# Altium PCB jz_dlt0.5.PcbDoc
Units mm, origin at the board's own origin, x right, y up, seen from the top; angles counter-clockwise.
Board outline 61.85 x 115.19 mm, 2 copper layers (Top Layer, Bottom Layer); 92 components, 65 nets, 356 pads, 57 vias.
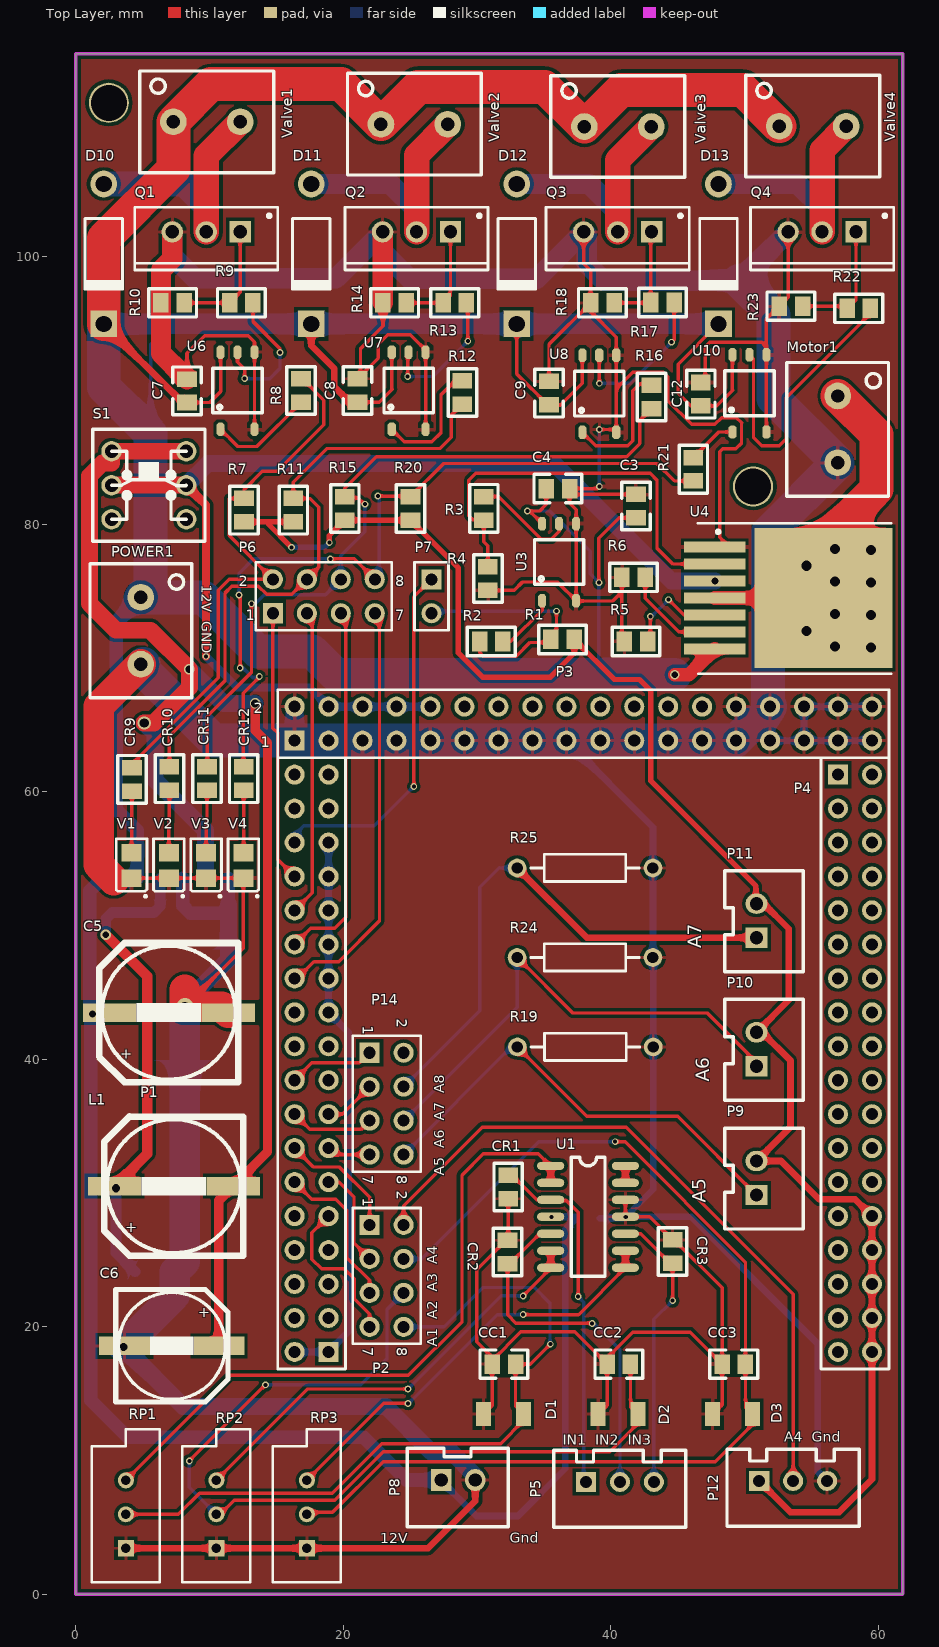
[diagram p0: Top Layer view]
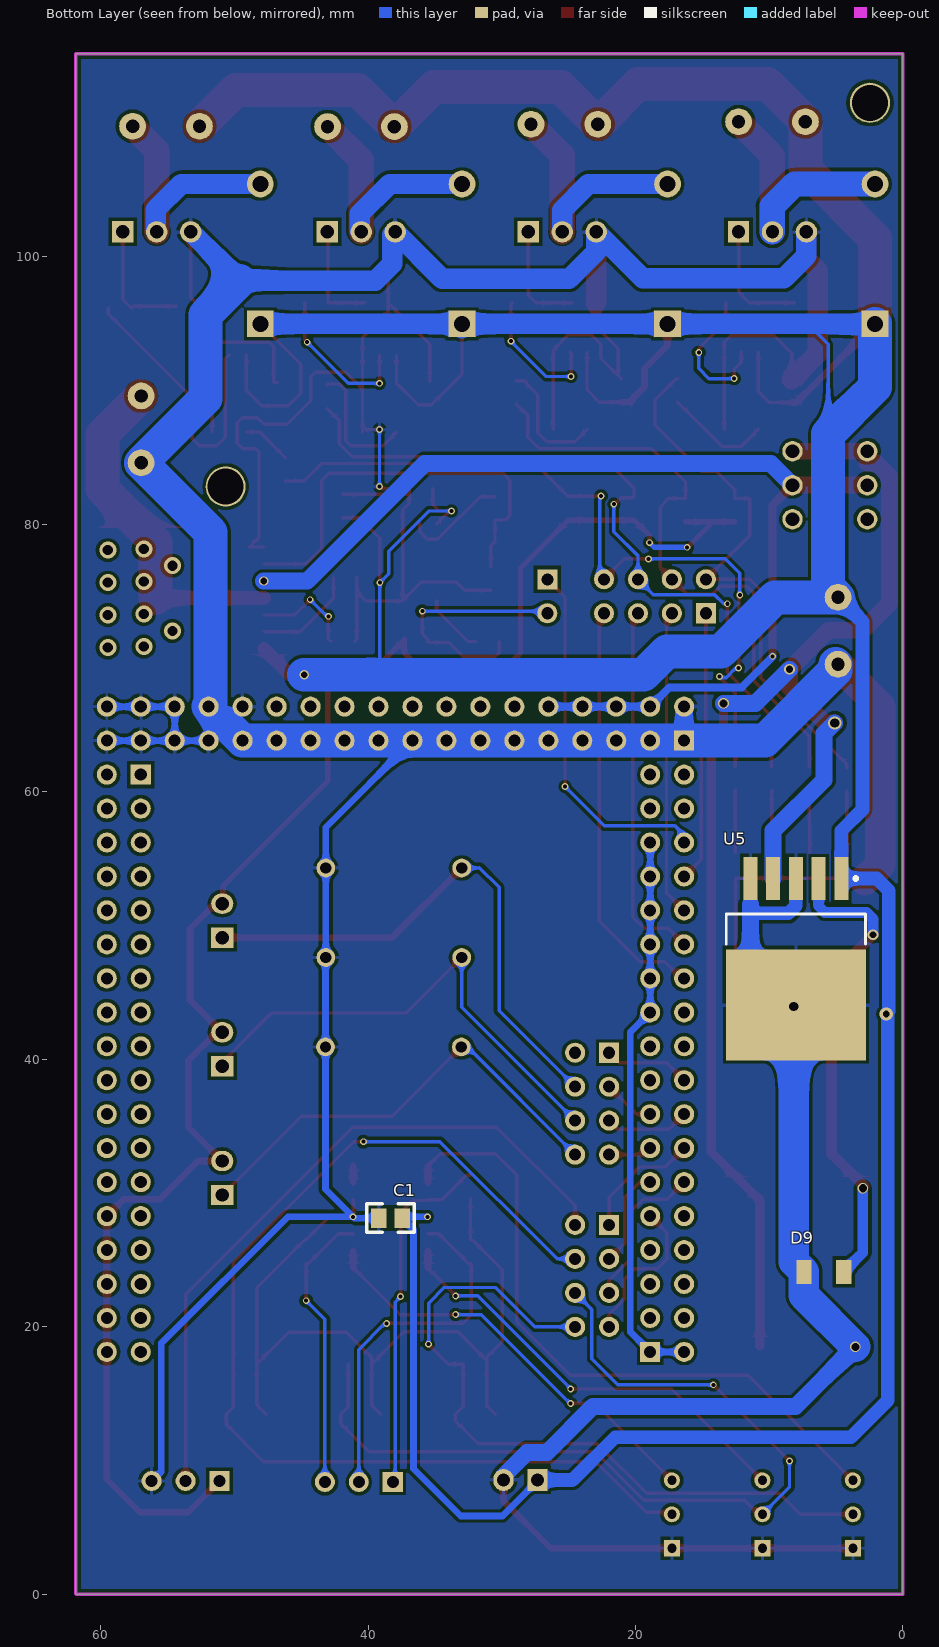
[diagram p1: Bottom Layer view, seen from below]
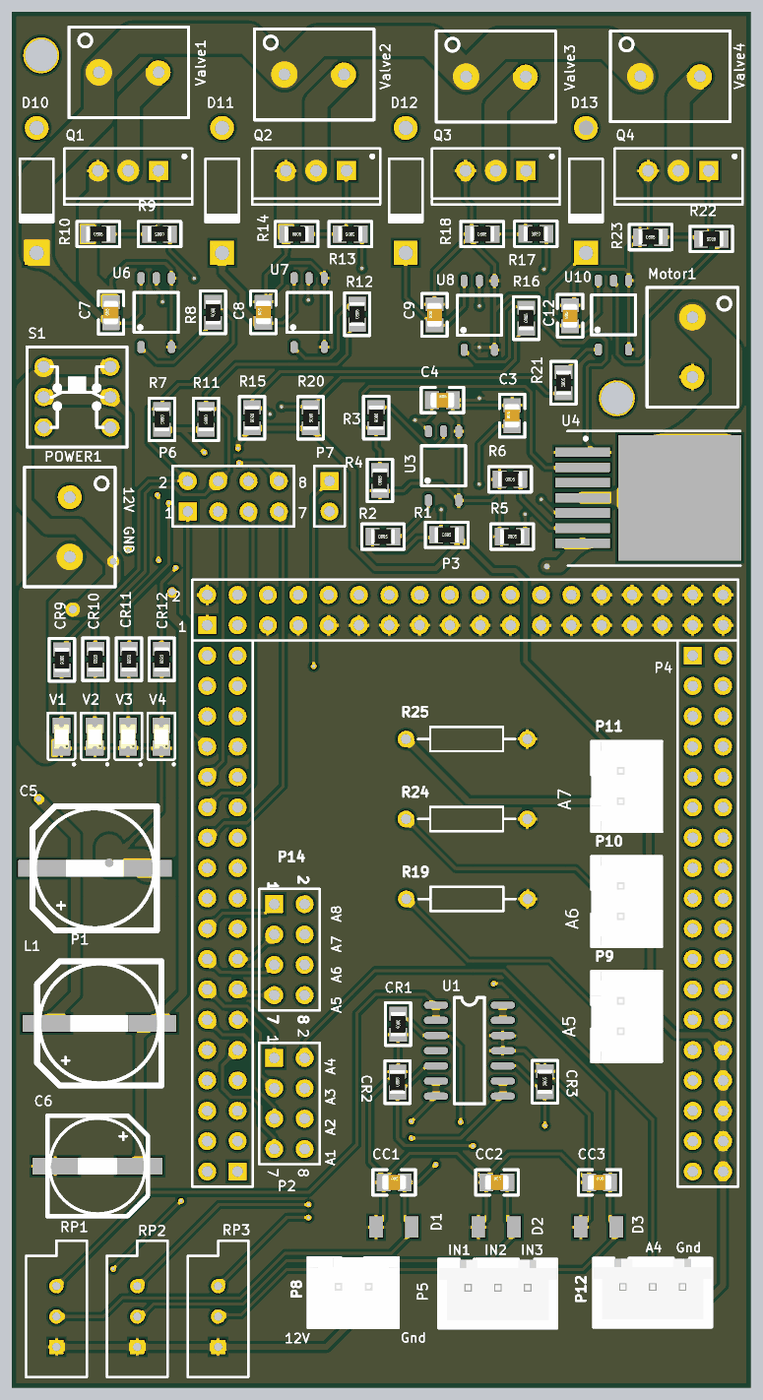
[diagram p2: 3D render of the assembled board from above, using the file's embedded part models]

## Layer stack, top to bottom
Top Solder: solder mask 0.0102, Solder Resist, Dk 3.5
Top Layer: signal copper 0.0356
Dielectric 1: dielectric 0.32, FR-4, Dk 4.8
Bottom Layer: signal copper 0.0356
Bottom Solder: solder mask 0.0102, Solder Resist, Dk 3.5

## Board outline
0,0 61.849,0 61.849,115.189 0,115.189

## Design rules (kind name [scope] priority, off if disabled: settings)
Clearance [All] p1: gap=0.254 ignorepadtopadclearanceinfootprint=FALSE except(0: Arc-Hole Track-Hole SMDPad-Hole THPad-Hole Via-Hole Fill-Hole Poly-Hole Region-Hole Text-Hole)
MinimumSolderMaskSliver [All] p1: minsoldermaskwidth=0.178
PolygonConnect [All] p1: connectstyle=Relief reliefconductorwidth=0.254 reliefentries=4 polygonreliefangle="90 Angle" airgapwidth=0.254
RoutingVias [All] p1: holewidth=0.3 width=0.5 viastyle="Through Hole" minholewidth=0.3 minwidth=0.5 maxholewidth=0.711 maxwidth=1.27
SilkToSilkClearance [All] p1: silktosilkclearance=0
SilkToSolderMaskClearance [IsPad] p1: minsilkscreentomaskgap=0 clearancetoexposedcopper=TRUE
SolderMaskExpansion [All] p1: expansion=0.102
Width [All] p1: maxlimit=2.54 minlimit=0.254 preferedwidth=0.254 minimp=50.000000 maximp=50.000000 favimp=50.000000
Width GND [InNet('GND')] p2: maxlimit=2.54 minlimit=0.254 preferedwidth=1.27 minimp=50.000000 maximp=50.000000 favimp=50.000000
Width 3.3V [InNet('VDD3.3')] p3: maxlimit=2.54 minlimit=0.254 preferedwidth=1.27 minimp=50.000000 maximp=50.000000 favimp=50.000000
Width 5V [InNet('DV5')] p4: maxlimit=2.54 minlimit=0.254 preferedwidth=1.27 minimp=50.000000 maximp=50.000000 favimp=50.000000
Width POWER [InNet('POWERA')] p5: maxlimit=2.54 minlimit=0.254 preferedwidth=2.54 minimp=50.000000 maximp=50.000000 favimp=50.000000
27 further rules are at their usual default settings.

## Components (designator, comment, footprint, x,y, rotation, side; value= is the part's Value field where it differs from the comment)
C1 "104" LC-0805_C 38.329,28.118 r0 bottom
C3 "0.1uF" LC-0805_C 41.885,81.37 r90 top locked
C4 "0.1uF" LC-0805_C 36.043,82.677 r0 top locked
C5 "10uF,16V" SMD-EC-F10 2.52,43.485 r0 top value=680uF
C6 "10uF,16V" SMD-EC-F8 10.693,18.567 r180 top value=220uF
C7 "0.1uF" LC-0805_C 8.306,89.992 r90 top locked
C8 "0.1uF" LC-0805_C 21.057,90.018 r90 top locked
C9 "0.1uF" LC-0805_C 35.382,89.814 r90 top locked
C12 "0.1uF" LC-0805_C 46.736,89.738 r90 top locked
CC1 "105" LC-0805_C 32.004,17.196 r0 top
CC2 "105" LC-0805_C 40.602,17.196 r0 top
CC3 "105" LC-0805_C 49.2,17.196 r0 top
CR1 "150" LC-0805_R 32.334,30.443 r270 top
CR2 "150" LC-0805_R 32.283,25.592 r90 top
CR3 "150" LC-0805_R 44.628,25.617 r90 top
CR9 "1K" LC-0805_R 4.191,60.935 r270 top locked
CR10 "1K" LC-0805_R 6.993,60.985 r270 top locked
CR11 "1K" LC-0805_R 9.804,60.985 r270 top locked
CR12 "1K" LC-0805_R 12.548,60.985 r270 top
D1 "Diode  Zener" LC-1206 31.979,13.462 r0 top
D2 "Diode  Zener" LC-1206 40.543,13.462 r0 top
D3 "Diode  Zener" LC-1206 49.107,13.462 r0 top
D9 "IN5824" LC-1206 5.91,24.105 r180 bottom
D10 "Diode 1N4001" DO-41 2.083,100.228 r270 top locked
D11 "Diode 1N4001" DO-41 17.602,100.228 r270 top locked
D12 "Diode 1N4001" DO-41 32.969,100.228 r270 top locked
D13 "Diode 1N4001" DO-41 48.057,100.228 r270 top locked
L1 "Inductor" SMD-EC-F10 2.896,30.505 r0 top value=33uH
Motor1 "端子2P" DUANZI2P 56.972,89.607 r270 top locked
P1 "Header 18X2" HDR2X18 18.898,18.11 r90 top locked
P2 "Header 4X2" HDR2X4 21.971,27.61 r270 top
P3 "Header 18X2" HDR2X18 16.358,63.83 r0 top
P4 "Header 18X2" HDR2X18 56.998,61.29 r270 top
P5 "Header 3" XH2.54-3 38.151,8.382 r0 top
P6 "Header 4X2" HDR2X4 14.732,73.355 r0 top locked
P7 "Header 2" HDR1X2 26.594,75.895 r270 top locked
P8 "Header 2" XH2.54-2 29.87,8.534 r0 top
P9 "Header 2" XH2.54-2 50.902,32.388 r90 top
P10 "Header 2" XH2.54-2 50.902,42.013 r90 top
P11 "Header 2" XH2.54-2 50.902,51.638 r90 top
P12 "Header 3" XH2.54-3 51.105,8.458 r0 top
P14 "Header 4X2" HDR2X4 21.971,40.488 r270 top
POWER1 "端子2P" DUANZI2P 4.851,74.549 r270 top locked
Q1 "IRF540N" TO-220AB 9.754,101.879 r180 top locked
Q2 "IRF540N" TO-220AB 25.476,101.879 r180 top locked
Q3 "IRF540N" TO-220AB 40.513,101.879 r180 top locked
Q4 "IRF540N" TO-220AB 55.804,101.879 r180 top locked
R1 "10k" LC-0805_R 36.398,71.399 r0 top locked
R2 "150" LC-0805_R 31.064,71.247 r0 top locked
R3 "50" LC-0805_R 30.505,81.204 r270 top locked
R4 "10k" LC-0805_R 30.81,75.946 r90 top locked
R5 "3.3K" LC-0805_R 41.885,71.247 r0 top locked
R6 "3.3K" LC-0805_R 41.707,76.048 r0 top locked
R7 "10k" LC-0805_R 12.573,81.065 r270 top locked
R8 "150" LC-0805_R 16.84,90.018 r270 top locked
R9 "50" LC-0805_R 12.37,96.571 r180 top locked
R10 "10K" LC-0805_R 7.239,96.571 r0 top locked
R11 "10k" LC-0805_R 16.256,81.065 r270 top locked
R12 "150" LC-0805_R 28.905,89.865 r90 top locked
R13 "50" LC-0805_R 28.332,96.571 r180 top locked
R14 "10K" LC-0805_R 23.839,96.571 r0 top locked
R15 "10k" LC-0805_R 20.108,81.192 r270 top locked
R16 "150" LC-0805_R 43.053,89.535 r90 top locked
R17 "50" LC-0805_R 43.866,96.596 r180 top locked
R18 "10K" LC-0805_R 39.37,96.571 r0 top locked
R19 "3.3K" AXIAL-0.4 38.1,40.919 r0 top value=30K
R20 "10k" LC-0805_R 25.019,81.192 r270 top locked
R21 "150" LC-0805_R 46.177,84.125 r90 top locked
R22 "50" LC-0805_R 58.547,96.164 r180 top locked
R23 "10K" LC-0805_R 53.467,96.319 r0 top locked
R24 "3.3K" AXIAL-0.4 38.075,47.612 r0 top value=30K
R25 "3.3K" AXIAL-0.4 38.075,54.305 r0 top value=30K
RP1 "10K" VR5 3.734,5.969 r90 top
RP2 "10K" VR5 10.503,5.969 r90 top
RP3 "10K" VR5 17.272,5.969 r90 top
S1 "SW DPDT" AN88 5.461,82.931 r0 top locked
U1 "LM324AD" SO-14 31.902,33.96 r0 top
U3 "TLP155" so6 34.874,74.286 r0 top locked
U4 "BTS7960" BTS7960 56.032,74.498 r270 top locked
U5 "LM2596S-5.0" TS5B_N 8.001,47.519 r270 bottom locked
U6 "TLP155" so6 10.82,87.113 r0 top locked
U7 "TLP155" so6 23.622,87.113 r0 top locked
U8 "TLP155" so6 37.871,86.884 r0 top locked
U10 "TLP155" so6 49.098,86.91 r0 top locked
V1 "LED Chip" CLED2012-0805 4.166,54.498 r270 top locked
V2 "LED Chip" CLED2012-0805 6.951,54.498 r270 top locked
V3 "LED Chip" CLED2012-0805 9.737,54.498 r270 top locked
V4 "LED Chip" CLED2012-0805 12.522,54.498 r270 top locked
Valve1 "端子2P" DUANZI2P 7.29,110.109 r0 top locked
Valve2 "端子2P" DUANZI2P 22.813,109.931 r0 top locked
Valve3 "端子2P" DUANZI2P 38.028,109.753 r0 top locked
Valve4 "端子2P" DUANZI2P 52.607,109.779 r0 top locked

## Footprints (in the part's own frame and the unit in brackets; to place one, negate y for a bottom-side part, rotate by r counter-clockwise, add the part's x,y. Pads: shape width x height; smd on the part's side, far side on the other; paste and mask are expansions set on the pad)
AN88 [mil]
  round 60 hole 40: 1(-110,100) 2(-110,0) 3(-110,-100) 4(110,-100) 5(110,0) 6(110,100)
  silkscreen extent -165,-165 165,165
AXIAL-0.4 [mm] "Axial Device, Thru-Hole; 2 Leads; 0.4 in Pin Spacing"
  round 1.4 hole 0.85: 1(-5.08,0) 2(5.08,0)
  silkscreen extent -4.06,-1.02 4.06,1.02
BTS7960 [mm] "贴片BTS7960"
  rect 0.8x4.6 smd: 1(-3.81,-8.255) 2(-2.54,-8.255) 3(-1.27,-8.255) 4(0,-8.255) 5(1.27,-8.255) 6(2.54,-8.255) 7(3.81,-8.255)
  rect 10.5x10.3 smd: 8(0,-0.127)
  silkscreen extent -5.59,-9.53 5.68,4.96
CLED2012-0805 [mm]
  rect 1.3x1.5 smd: 1(-0.95,0) 2(0.95,0)
  silkscreen extent -2,-1.15 2.36,1.15, body extent -1,-0.63 1,0.62, height 0.7
DO-41 [mm] "Diode, Axial; Body 5.2 x 2.7 mm (LxDia. max), Lead Dia. 0.86 mm (max)"
  round 2 hole 1.2: 1(-5.23,0)
  rect 2x2 hole 1.2: 2(5.23,0)
  silkscreen extent -2.65,-1.4 2.75,1.4
DUANZI2P [mm]
  round 2 hole 1: 0(0,0) 1(5,0)
  silkscreen extent -2.5,-3.8 7.5,3.8
HDR1X2 [mm] "Connector; Header; 2 Position"
  rect 1.5x1.5 hole 0.9: 1(0,0)
  round 1.5 hole 0.9: 2(2.54,0)
  silkscreen extent -1.27,-1.27 3.81,1.27
HDR2X4 [mm] "Connector; Header; 4x2 Position"
  rect 1.5x1.5 hole 0.9: 1(0,0)
  round 1.5 hole 0.9: 2(0,2.54) 3(2.54,0) 4(2.54,2.54) 5(5.08,0) 6(5.08,2.54) 7(7.62,0) 8(7.62,2.54)
  silkscreen extent -1.27,-1.27 8.89,3.81
HDR2X18 [mm] "Connector; Header; 18x2 Position"
  rect 1.5x1.5 hole 0.9: 1(0,0)
  round 1.5 hole 0.9: 2(0,2.54) 3(2.54,0) 4(2.54,2.54) 5(5.08,0) 6(5.08,2.54) 7(7.62,0) 8(7.62,2.54) 9(10.16,0) 10(10.16,2.54) 11(12.7,0) 12(12.7,2.54) 13(15.24,0) 14(15.24,2.54) 15(17.78,0) 16(17.78,2.54) 17(20.32,0) 18(20.32,2.54) 19(22.86,0) 20(22.86,2.54) 21(25.4,0) 22(25.4,2.54) 23(27.94,0) 24(27.94,2.54) 25(30.48,0) 26(30.48,2.54) 27(33.02,0) 28(33.02,2.54) 29(35.56,0) 30(35.56,2.54) 31(38.1,0) 32(38.1,2.54) 33(40.64,0) 34(40.64,2.54) 35(43.18,0) 36(43.18,2.54)
  silkscreen extent -1.27,-1.27 44.45,3.81
LC-0805_C [mm]
  rect 1.16x1.47 smd: 1(-0.875,0) 2(0.875,0)
  silkscreen extent -1.78,-1.06 1.78,1.06, body extent -1,-0.63 1,0.63, height 0.77
LC-0805_R [mm]
  rect 1.16x1.47 smd: 1(-0.875,0) 2(0.875,0)
  silkscreen extent -1.78,-1.06 1.78,1.06, body extent -1,-0.62 1,0.63, height 0.49
LC-1206 [mm]
  rect 1.13x1.8 smd: 1(-1.49,0) 2(1.49,0)
SMD-EC-F8 [mm]
  rect 3.8x1.4 smd: 1(0,0) 2(7.051,0)
  silkscreen extent -0.69,-4.22 7.71,4.2
SMD-EC-F10 [mm]
  rect 4x1.4 smd: 1(0,0) 2(8.86,0)
  silkscreen extent -0.78,-5.2 9.62,5.2
so6 [mm]
  oct 0.6x1 smd: 1(0,0) 3(2.54,0) 4(2.54,5.775) 5(1.27,5.775) 6(0,5.775)
  silkscreen extent -0.58,1.22 3.12,4.57
SO-14 [mil]
  oval 80x24 smd: 1(142,-76) 2(142,-126) 3(142,-176) 4(142,-226) 5(142,-276) 6(142,-326) 7(142,-376) 8(362,-376) 9(362,-326) 10(362,-276) 11(362,-226) 12(362,-176) 13(362,-126) 14(362,-76)
  silkscreen extent 202,-401 302,-51
TO-220AB [mm] "TO, Thru-Hole, Vertical, Heatsink Mounted; 3 In-Line Leads; Pitch 2.54 mm"
  rect 1.6x1.6 hole 1: 1(-2.54,0)
  round 1.6 hole 1: 2(0,0) 3(2.54,0)
  silkscreen extent -5.35,-1.85 5.35,2.85, body extent -5.4,-1.9 5.4,2.9, height 19.3
TS5B_N [mm] "D2-PAK, 6-Leads, Body 8.6x10.2mm, Pitch 1.7mm, Lead Span 14.1mm, IPC Medium Density"
  rect 3.2x1.05 smd: 1(-6,3.4) 2(-6,1.7) 3(-6,0) 4(-6,-1.7) 5(-6,-3.4)
  rect 8.3x10.45 smd: 6(3.45,0)
  silkscreen extent -6.12,-5.2 -1.1,5.2, body extent -3.35,-5.2 6.05,5.2, height 4.65
VR5 [mm] "Thru-Hole; 3 Leads"
  rect 1.2x1.2 hole 0.7: 1(-2.54,0)
  round 1.2 hole 0.7: 2(0,0) 3(2.54,0)
  silkscreen extent -5.08,-2.54 6.35,2.54
XH2.54-2 [mil]
  rect 60x65 hole 39.37: 1(-100.1,0)
  oval 60x65 hole 39.37: 2(0,0)
  silkscreen extent -200,-138 97,93, body extent -198,-142 98,94, height 276
XH2.54-3 [mm]
  rect 1.5x1.5 hole 0.9: 1(0,0)
  round 1.5 hole 0.9: 2(2.54,0) 3(5.08,0)
  silkscreen extent -2.41,-3.38 7.47,2.39, body extent -2.41,-3.41 7.49,2.34, height 7

## Part data
C1: library part CAP(瓷片,104), "1.02.08.0014"
C3 C4 C7 C8 C9 C12: library part Cap, "Capacitor", LatestRevisionDate=17-Jul-2002, LatestRevisionNote="Re-released for DXP Platform.", PackageDescription="Radial Cap, Thru-Hole; 2 Leads; 0.3 in Pin Spacing", PackageReference=RAD-0.3, Published=8-Jun-2000, Publisher="Altium Limited"
C5 C6: library part "Cap Pol 2x5", "Polarized Capacitor (Radial)", Voltage=16V, Published=8-Jun-2000, Publisher="Altium Limited", Revision="July-2002: Re-released for DXP Platform."
CC1 CC2 CC3: library part "Cap Chip 0805", "Polarized Capacitor (Radial)", Published=8-Jun-2000, Publisher="Altium Limited", Revision="July-2002: Re-released for DXP Platform."
CR1 CR2 CR3 CR9 CR10 CR11 CR12: library part "Resistor Chip 0805", "Resistor", Published=8-Jun-2000, Publisher="Altium Limited", Revision="July-2002: Re-released for DXP Platform."
D1 D2 D3: "Zener Diode", Published=8-Jun-2000, Publisher="Altium Limited", Revision="July-2002: Re-released for DXP Platform."
D9: library part "Diode  Zener", "Zener Diode", Published=8-Jun-2000, Publisher="Altium Limited", Revision="July-2002: Re-released for DXP Platform."
D10 D11 D12 D13: "1 Amp General Purpose Rectifier", Code_JEDEC=DO-204-AL, ComponentLink1Description="Manufacturer Link", ComponentLink1URL=http://www.fairchildsemi.com/, ComponentLink2Description=Datasheet, ComponentLink2URL=http://www.fairchildsemi.com/ds/1N%2F1N4001.pdf, DatasheetVersion=1998, LatestRevisionDate=17-Jul-2002, LatestRevisionNote="Re-released for DXP Platform.", PackageDescription="Diode, Axial; Body 5.2 x 2.7 mm (LxDia. max), Lead Dia. 0.86 mm (max)", PackageReference=DO-41, PackageVersion=Aug-1999, Published=8-Jun-2000, Publisher="Altium Limited"
Motor1 POWER1 Valve1 Valve2 Valve3 Valve4: library part DUANZI2
P1 P3 P4: "Header, 18-Pin, Dual row", LatestRevisionDate=17-Jul-2002, LatestRevisionNote="Re-released for DXP Platform.", Publisher="Altium Limited"
P2 P6 P14: "Header, 4-Pin, Dual row", LatestRevisionDate=17-Jul-2002, LatestRevisionNote="Re-released for DXP Platform.", Publisher="Altium Limited"
P5 P12: "Header, 3-Pin", LatestRevisionDate=17-Jul-2002, LatestRevisionNote="Re-released for DXP Platform.", Publisher="Altium Limited"
P7 P8 P9 P10 P11: "Header, 2-Pin", LatestRevisionDate=17-Jul-2002, LatestRevisionNote="Re-released for DXP Platform.", Publisher="Altium Limited"
Q1 Q2 Q3 Q4: "HEXFET Power MOSFET", ComponentLink1Description="Manufacturer Link", ComponentLink1URL=http://www.irf.com/, ComponentLink2Description=Datasheet, ComponentLink2URL=http://www.irf.com/product-info/datasheets/data/irf540n.pdf, DatasheetVersion=May-1998, LatestRevisionDate=17-Jul-2002, LatestRevisionNote="Re-released for DXP Platform.", Note="Pin 2 is electrically connected to pin 4.", PackageDescription="TO, Thru-Hole, Vertical, Heatsink Mounted; 3 In-Line Leads; Pitch 2.54 mm", PackageReference=TO-220AB, PackageVersion=Feb-1997, Published=8-Jun-2000, Publisher="Altium Limited", Sim Note="Thermal Model provided is not called on from main Subckt."
R1 R2 R3 R4 R5 R6 R7 R8 R9 R10 R11 R12 R13 R14 R15 R16 R17 R18 R19 R20 R21 R22 R23 R24 R25: library part Res2, "Resistor", LatestRevisionDate=17-Jul-2002, LatestRevisionNote="Re-released for DXP Platform.", PackageDescription="Axial Device, Thru-Hole; 2 Leads; 0.4 in Pin Spacing", PackageReference=AXIAL-0.4, Published=8-Jun-2000, Publisher="Altium Limited"
RP1 RP2 RP3: library part Res_t
S1: "Switch", Code_IPC=SOT26A-6, Code_JEITA=SC-74, LatestRevisionDate=29-May-2009, LatestRevisionNote="IPC-7351 Footprint Added.", PackageDescription="6-Pin SOT-23 Package 0.95 mm Pitch, 2.7 mm Lead Span", PackageReference=SOT23-6, PackageVersion=Mar-2001, Published=24-Mar-1999, Publisher="Altium Limited"
U1: "Quadruple Operational Amplifier", PackageDocument=Jan-1998, ComponentLink1Description="Manufacturer Link", ComponentLink1URL=http://www.ti.com/, DatasheetDocument=Jan-1989, LatestRevisionDate=4-Mar-2005, LatestRevisionNote="Stylized 3D Model Added.", PackageReference=D014, Published=15-Apr-2002, Publisher="Altium Limited"
U4: library part Component_1_1
U5: "SIMPLE SWITCHER?Power Converter 150 KHz 3A Step-Down Voltage Regulator, 5-pin TO-263", Manufacturer="National Semiconductor", PackageTopMarking="NSUZXYTTE#*LM2596S*-5.0 P+", PowerWise=N, Supplier Part Number 1=1214546, Code_JEDEC=MO-169-AB, ComponentLink1Description="LM2596 Datasheet", ComponentLink1URL=http://www.national.com/ds/LM/LM2596.pdf, ComponentLink2Description="LM2596 Web Page", ComponentLink2URL=http://www.national.com/pf/LM/LM2596.html, ComponentLink3Description="TS5B Package Page", ComponentLink3URL=http://www.national.com/packaging/folders/ts5b.html, CompType=Switcher, DatasheetVersion=May-2002, PackageDescription="TO-263, Molded, .400 x .390 x .180in, 5 Lead, .067in Pitch, Surface Mount", PackageReference=TS5B, PackageVersion="revD, Apr-2005", PartNumber=LM2596S-5.0, PinCount=5, Published=4-Dec-2008, Publisher="Altium Limited", RoHS=N, Supplier 1=Farnell
V1 V2 V3 V4: "Typical Chip LED", Published=8-Jun-2000, Publisher="Altium Limited", Revision="July-2002: Re-released for DXP Platform."
L1: Code_IEC=1005, Code_JEITA=0402, LatestRevisionDate=29-May-2009, LatestRevisionNote="IPC-7351 Footprint Added.", PackageDescription="Chip Inductor", PackageReference=0402-A, Published=8-Jun-2000, Publisher="Altium Limited"

## Free pads (board coordinates)
  round 3 hole 2.7 unplated: 2(2.464,111.531) 3(50.648,82.829)

## Via types
v1: diameter 0.5, hole 0.3, Top Layer to Bottom Layer, 22 vias
v2: diameter 0.5, hole 0.3, Top Layer to Bottom Layer, tented both sides, 15 vias
v3: diameter 1.27, hole 0.762, Top Layer to Bottom Layer, 10 vias
v4: diameter 0.8, hole 0.6, Top Layer to Bottom Layer, 3 vias
v5: diameter 0.7, hole 0.5, Top Layer to Bottom Layer, tented both sides, 2 vias
v6: diameter 1, hole 0.7, Top Layer to Bottom Layer, 1 vias
v7: diameter 0.8, hole 0.5, Top Layer to Bottom Layer, 1 vias
v8: diameter 1, hole 0.5, Top Layer to Bottom Layer, 1 vias
v9: diameter 0.8, hole 0.55, Top Layer to Bottom Layer, 1 vias
v10: diameter 1.27, hole 0.7, Top Layer to Bottom Layer, tented both sides, 1 vias

## Nets (pads, with @x,y where several pads share a name; then routed paths per layer and width w, separated by ;. In a path a pad name is that pad's centre, name@x,y a point inside that pad or via, vN(x,y) a via of type N, cw(c..) or ccw(c..) an arc to the next point about the centre after c; other vN are vias at no path point)
A1: CC1.2 D1.2 P2.8 RP1.2 | length 56.1
  Top Layer w0.254: RP1.2 7.671,5.969 9.246,7.544 10.081,7.544 10.097,7.528 19.161,7.528 22.885,11.252 31.767,11.252 33.469,12.954 D1.2 32.879,14.052 CC1.2 33.985,17.196 v1(35.484,18.694)
  Bottom Layer w0.254: P2.8 27.534,19.99 30.476,22.932 34.294,22.932 35.458,21.768 35.458,18.72 v1(35.484,18.694)
A2: CC2.2 D2.2 P2.6 RP2.2 | length 67.3
  Top Layer w0.254: v1@8.484,9.855 v1(8.484,9.957) v1(14.173,15.646) ; RP2.2 10.795,5.969 11.846,7.02 19.372,7.02 22.994,10.643 39.929,10.643 42.033,12.747 D2.2 41.477,14.018 CC2.2
  Bottom Layer w0.254: v1(8.484,9.957) 8.484,7.988 RP2.2 ; v1(14.173,15.646) 21.311,15.646 23.266,17.602 23.266,21.285 P2.6
A3: CC3.2 D3.2 P2.4 RP3.2 | length 81.8
  Top Layer w0.254: RP3.2 17.424,6.121 19.191,6.121 22.976,9.906 47.828,9.906 D3.2@50.571,12.649 ; v1(40.335,33.833) 41.072,33.833 50.075,24.83 CC3.2 50.075,13.984 D3.2 50.597,12.675 D3.2@50.571,12.649 ; D3.2@50.571,13.005 D3.2@50.571,12.649
  Bottom Layer w0.254: P2.4 25.857,25.07 34.62,33.833 v1(40.335,33.833)
A4: P2.2 P12.2 | length 52.1
  Top Layer w0.254: P2.2 24.511,29.032 30.404,34.925 41.148,34.925 53.645,22.428 P12.2
A5: P9.1 P14.8 R19.1 | length 34.3
  Top Layer w0.254: R19.1 38.202,35.738 45.009,35.738 P9.1
  Bottom Layer w0.254: P14.8 32.563,40.919 R19.1
A6: P10.1 P14.6 R24.1 | length 37.2
  Top Layer w0.254: R24.1 37.148,43.459 47.219,43.459 50.902,39.776 P10.1
  Bottom Layer w0.254: P14.6 32.995,43.891 R24.1
A7: P11.1 P14.4 R25.1 | length 41
  Top Layer w0.5: R25.1@32.995,54.051 R25.1 38.204,49.096 P11.1
  Bottom Layer w0.254: P14.4 30.201,43.637 30.201,52.857 31.674,54.331 31.699,54.305 R25.1
ADAIN0: P1.9 P2.7 | length 11.6
  Top Layer w0.254: P1.9 17.653,27.026 17.653,25.044 18.376,24.321 20.053,24.321 20.84,23.534 20.84,22.061 21.971,20.93 P2.7
ADAIN1: P1.12 P2.5 | length 11.7
  Top Layer w0.254: P1.12 17.628,29.54 19.431,29.54 20.269,28.702 20.269,25.172 21.971,23.47 P2.5
ADAIN2: P1.11 P2.3 | length 7.5
  Top Layer w0.254: P1.11 19.685,30.81 20.803,29.693 20.803,26.238 P2.3
ADAIN3: P1.14 P2.1 | length 9.2
  Top Layer w0.254: P1.14 17.767,31.941 19.697,31.941 21.971,29.667 P2.1
ADAIN4: P1.13 P14.7 | length 3.3
  Top Layer w0.254: P1.13 19.38,32.868 P14.7
ADAIN5: P1.16 P14.5 | length 6.4
  Top Layer w0.254: P1.16 17.475,34.773 18.416,34.773 18.429,34.759 21.323,34.759 P14.5
ADAIN6: P1.15 P14.3 | length 3.9
  Top Layer w0.254: P1.15 19.914,35.89 P14.3
ADAIN7: P1.18 P14.1 | length 6.5
  Top Layer w0.254: P1.18 17.653,39.726 21.209,39.726 P14.1
DV5: P3.4 P3.6 P3.8 P3.10 S1.2 S1.5 U4.3 | length 81.3
  Top Layer w0.6: S1.5 9.737,81.449 v1(9.737,70.129)
  Top Layer w1.27: S1.2 S1.5
  Bottom Layer w0.6: v1(9.737,70.129) 12.048,67.818 17.45,67.818 P3.4 P3.6 P3.8 P3.10
  Bottom Layer w0.762: v5@47.752,75.717 v5(47.803,75.768)
  Bottom Layer w1.27: S1.5 9.881,84.557 35.763,84.557 44.552,75.768 v5(47.803,75.768)
EPWM1_A: P7.2 R1.1 R2.1 | length 21.8
  Top Layer w0.254: R2.1 30.189,70.42 30.48,70.129 32.918,70.129 33.96,71.171 ; v2(35.941,73.508) 35.941,71.817 R1.1 R1.1@35.523,71.171 ; 33.96,71.171 R1.1@35.523,71.171 ; 33.96,71.171 R1.1@35.523,71.171 ; 33.96,71.171 R1.1@35.523,71.171
  Bottom Layer w0.254: P7.2 26.746,73.508 v2(35.941,73.508)
EPWM1A: P1.32 P7.1 | length 27
  Top Layer w0.254: v1(25.273,60.401) 25.273,74.574 P7.1
  Bottom Layer w0.254: P1.32 16.358,56.769 17.043,57.455 22.327,57.455 v1(25.273,60.401)
EPWM2_A: CR9.1 P6.2 R7.1 R8.1 | length 41.7
  Top Layer w0.254: CR9.1 4.191,62.078 10.643,68.529 10.643,75.082 11.455,75.895 P6.2 11.455,79.172 11.455,81.94 R7.1 12.573,82.601 13.945,83.972 15.062,83.972 18.542,87.452 18.542,89.295 16.944,90.893 R8.1
EPWM2A: P1.30 P6.1 | length 20.4
  Top Layer w0.254: P6.1 14.732,64.77 15.088,64.414 15.088,54.94 P1.30
EPWM3_A: CR10.1 P6.4 R11.1 R12.1 | length 47
  Top Layer w0.254: CR10.1 6.993,64.162 11.151,68.319 11.151,74.872 11.666,75.387 13.641,75.387 14.264,74.764 16.141,74.764 P6.4 18.161,76.784 18.161,81.28 17.501,81.94 R11.1 16.256,83.16 18.771,85.674 27.211,85.674 28.067,86.531 28.067,88.152 R12.1
EPWM3A: P1.28 P6.3 | length 22.9
  Top Layer w0.254: P1.28 17.678,52.451 17.678,72.949 P6.3
EPWM4_A: CR11.1 P6.6 R15.1 R16.1 | length 56.2
  Top Layer w0.254: CR11.1 9.83,61.886 9.83,65.637 13.132,68.939 v1(13.132,74.066) ; v2(21.615,81.509) 21.565,81.509 21.082,81.991 20.185,81.991 R15.1 20.108,82.694 22.479,85.065 41.181,85.065 42.164,86.048 42.164,87.771 R16.1
  Bottom Layer w0.254: v1(13.132,74.066) 13.404,74.066 14.09,74.752 18.669,74.752 P6.6 19.812,77.648 21.615,79.451 v2(21.615,81.509)
EPWM4A: P1.26 P6.5 | length 27.6
  Top Layer w0.254: P1.26 17.551,49.784 19.355,49.784 20.193,50.622 20.193,72.974 P6.5
EPWM5_A: CR12.1 P6.8 R20.1 R21.1 | length 63.3
  Top Layer w0.254: v1(12.192,74.727) 12.29,74.629 v1(12.29,69.266) ; CR12.1 12.53,61.878 12.53,67.369 13.716,68.555 v1(13.716,68.631) ; v1(19.025,77.419) 20.828,77.419 P6.8 ; v2(22.581,82.118) 24.968,82.118 R20.1 27.508,84.557 43.459,84.557 44.766,83.25 R21.1
  Bottom Layer w0.254: v1(12.29,69.266) 12.499,69.266 13.223,68.542 13.703,68.542 13.716,68.555 v1(13.716,68.631) ; v1(19.025,77.419) 13.284,77.419 12.205,76.34 ; P6.8 22.678,76.221 22.678,81.886 ; v2(22.581,82.118) v2@22.446,82.118 ; v1@12.205,74.727 12.205,76.34 ; v1@12.205,74.727 12.205,76.34 ; v1@12.205,74.727 12.205,76.34 ; v2@22.446,82.118 22.678,81.886 ; v2@22.446,82.118 v2@22.513,82.051 ; v2@22.446,82.118 v2@22.513,82.051 ; v2@22.513,82.051 22.678,81.886 ; v2@22.513,82.051 22.678,81.886 ; v2@22.513,82.051 22.678,81.886
EPWM5A: P1.24 P6.7 | length 31.3
  Top Layer w0.254: P1.24 16.561,46.05 17.805,47.295 19.66,47.295 22.708,50.343 22.708,73 P6.7
GND: C1.2 C3.2 C4.2 C5.2 C6.2 C7.2 C8.2 C9.2 C12.2 CC1.1 CC2.1 CC3.1 CR1.2 CR2.2 CR3.2 D1.1 D2.1 D3.1 D9.1 Motor1.1 P3.1 P3.2 P3.3 P3.5 P3.7 P3.9 P3.11 P3.13 P3.15 P3.17 P3.19 P3.21 P3.23 P3.25 P3.27 P3.28 P3.29 P3.30 P3.31 P3.32 P3.33 P3.34 P3.35 P3.36 P8.2 P12.3 POWER1.1 Q1.3 Q2.3 Q3.3 Q4.3 R4.1 R5.1 R6.1 R10.1 R14.1 R18.1 R19.2 R23.1 R24.2 R25.2 RP1.1 RP2.1 RP3.1 U1.11 U1.12 U3.3 U3.4 U4.1 U5.3 U5.5 U5.6 U6.3 U6.4 U7.3 U7.4 U8.3 U8.4 U10.3 U10.4 V1.2 V2.2 V3.2 V4.2 | length 608.9
  Top Layer w0.254: 3.048,53.548 V1.2 V2.2 V3.2 V4.2 12.522,48.311 v10(8.153,43.942) ; C7.2 8.306,92.786 9.627,94.107 12.878,94.107 13.36,93.624 U6.4 U6.3 13.36,87.63 ; C8.2 C8.2@21.285,91.121 ; R14.1 22.964,94.821 21.285,93.142 C8.2@21.285,91.121 ; U7.3 U7.4 26.162,93.04 25.019,94.183 23.317,94.183 22.606,93.472 22.606,92.442 C8.2@21.285,91.121 ; D1.1 31.129,14.102 CC1.1 CC1.1@31.129,17.464 ; R4.1 32.78,75.071 33.401,75.692 36.008,75.692 U3.3 ; CR1.2 32.334,26.518 CR2.2 32.18,26.467 29.972,24.259 29.972,18.872 31.129,17.715 CC1.1@31.129,17.464 ; C9.2 35.382,93.458 R18.1 ; Q3.3 37.973,99.48 38.495,98.958 R18.1 ; D2.1 39.727,14.136 CC2.1 ; v2(39.141,82.829) 38.989,82.677 C4.2 C4.2@36.918,82.245 ; v2(39.141,87.097) 40.411,87.097 U8.3 U8.4 40.411,94.005 38.495,95.922 R18.1 ; 40.411,90.145 41.656,91.389 43.942,91.389 44.272,91.059 44.272,89.256 46.05,87.478 47.777,87.478 48.285,87.986 49.403,87.986 49.784,87.605 49.779,87.6 49.779,86.076 49.352,85.649 48.383,85.649 48.158,85.425 48.158,79.045 48.895,78.308 U4.1 ; R6.1 40.832,74.969 ; R5.1 40.832,71.425 40.832,74.969 ; U1.12 U1.11 v1(41.123,28.219) 42.901,28.219 CR3.2 44.732,26.492 48.325,22.899 CC3.1 ; C3.2 C4.2@36.918,82.245 ; C12.2 47.066,90.613 47.066,93.289 47.394,93.617 51.308,93.617 51.638,93.287 U10.4 ; D3.1 48.325,14.17 CC3.1 ; U10.3 U10.4 ; Q4.3 53.264,96.991 R23.1 51.638,95.365 U10.4 ; CC1.1@31.129,17.464 33.274,19.609 37.314,19.609 CC2.1 ; C4.2@36.918,82.245 36.918,81.599 37.414,81.102 U3.4 U3.3 ; U3.3 37.414,74.27 40.132,74.27 40.832,74.969 ; CC2.1 39.727,17.68 41.631,19.583 45.937,19.583 CC3.1
  Top Layer w0.5: RP1.1 RP2.1 RP3.1 26.34,3.429 29.87,6.96 P8.2
  Top Layer w1.524: Q1.3 7.214,99.873 6.364,99.023 R10.1 6.364,92.809 C7.2 ; Q2.3 22.936,96.599 R14.1
  Top Layer w2.286: 2.837,53.401 1.702,54.536 1.702,66.399 POWER1.1 ; 8.153,45.187 v10(8.153,43.942) 10.922,43.942 C5.2
  Bottom Layer w0.254: v2(39.141,82.829) v2(39.141,87.097)
  Bottom Layer w0.5: P3.17 43.155,57.353 R25.2 R24.2 43.18,47.587 R19.2 43.18,30.277 v1(41.123,28.219) ; C1.2 41.021,28.118 v1(41.123,28.219) ; 50.724,65.176 P3.29@51.918,63.983 ; P3.30 P3.29@51.918,63.983 ; P12.3 55.474,9.169 55.474,18.745 45.999,28.219 v1(41.123,28.219) ; P3.35 P3.33 P3.31 ; P3.36 P3.34 P3.32 P3.31 ; P3.29@51.918,63.983 P3.29 P3.31
  Bottom Layer w1.016: U5.3 8.001,51.486 8.56,50.927 10.846,50.927 11.455,51.537 11.401,51.591 U5.5
  Bottom Layer w1.27: v4(3.556,18.491) 8.026,14.021 23.19,14.021 26.619,10.592 28.115,10.592 29.87,8.837 P8.2 ; U5.6 11.401,47.469 11.401,51.591 ; P3.1 P3.2
  Bottom Layer w1.524: Q1.3 7.214,100.076 8.89,98.4 19.456,98.4 Q2.3 22.936,100.406 24.968,98.374 34.468,98.374 Q3.3 38.202,101.651 38.202,99.492 39.472,98.222 49.606,98.222 Q4.3
  Bottom Layer w2.286: v4(3.556,18.491) 7.4,22.335 D9.1 8.153,24.858 v10(8.153,43.942)
  Bottom Layer w2.54: POWER1.1@5.055,69.549 5.055,69.088 10.312,63.83 P3.1 P3.3 P3.5 P3.7 P3.9 P3.11 P3.13 P3.15 P3.17 P3.19 P3.21 P3.23 P3.25 P3.27 50.724,65.176 ; 49.606,98.222 52.172,95.656 52.172,89.408 Motor1.1 51.765,79.4 51.765,66.523 P3.30
IN1: CR1.1 P5.1 U1.3 | length 26.8
  Top Layer w0.254: CR1.1 32.639,31.318 34.468,29.489 U1.3 35.56,29.439 36.678,29.439 37.567,28.55 v1(37.567,22.25)
  Bottom Layer w0.254: v1(37.567,22.25) 37.977,21.84 37.977,8.556 P5.1
IN2: CR2.1 P5.2 U1.5 | length 27.4
  Top Layer w0.254: U1.5 34.696,26.949 32.464,24.717 CR2.1 32.283,20.879 32.893,20.269 38.583,20.269 v1(38.608,20.244)
  Bottom Layer w0.254: v1(38.608,20.244) 38.735,20.244 40.691,18.288 P5.2
IN3: CR3.1 P5.3 U1.10 | length 21.4
  Top Layer w0.254: U1.10 42.24,26.949 44.447,24.742 CR3.1 v1(44.628,21.946)
  Bottom Layer w0.254: P5.3 43.231,20.549 v1(44.628,21.946)
NetC6_1: C6.1 L1.2 S1.1 S1.6 U5.4 | length 104.2
  Top Layer w0.7: C6.1 10.693,29.444 L1.2 14.326,33.076 14.326,63.678 13.411,64.592 v4(13.411,66.624)
  Top Layer w1.27: v6(5.105,65.151) 5.828,65.151 8.484,67.807 v9(8.484,69.164) 5.563,72.085 2.997,72.085 1.016,74.066 1.016,83.615 1.983,84.582 ; S1.6 S1.1 2.667,84.582 ; 1.983,84.582 2.667,84.582 ; 1.983,84.582 2.667,84.582 ; 1.983,84.582 2.667,84.582
  Bottom Layer w1.27: v6(5.105,65.151) 5.904,64.352 5.904,60.898 9.701,57.101 U5.4 ; v9(8.484,69.164) 11.024,66.624 v4(13.411,66.624)
NetCR9_2: CR9.2 V1.1 | length 4.6
  Top Layer w0.254: V1.1 4.166,57.734 4.191,57.76 CR9.2
NetCR10_2: CR10.2 V2.1 | length 4.7
  Top Layer w0.254: V2.1 6.951,57.734 6.993,57.777 CR10.2
NetCR11_2: CR11.2 V3.1 | length 4.7
  Top Layer w0.254: V3.1 9.737,57.734 9.804,57.802 CR11.2
NetCR12_2: CR12.2 V4.1 | length 4.7
  Top Layer w0.254: V4.1 12.548,55.474 CR12.2
NetD9_2: D9.2 L1.1 U5.2 | length 35.7
  Top Layer w0.8: v7(2.235,49.313) 5.334,46.215 5.334,32.944 L1.1
  Bottom Layer w0.8: v7(2.235,49.313) 2.235,50.495 2.718,50.978 5.842,50.978 6.301,51.437 U5.2 ; v4(2.997,30.353) 2.997,25.527 D9.2
NetD10_1: D10.1 Q1.2 Valve1.1 | length 19.6
  Top Layer w1.905: Q1.2 9.766,101.892 9.766,107.586 Valve1.1
  Bottom Layer w1.905: D10.1 8.105,105.458 9.779,103.784 9.754,103.759 Q1.2
NetD11_1: D11.1 Q2.2 Valve2.1 | length 19.3
  Top Layer w1.905: Q2.2 25.476,107.594 Valve2.1
  Bottom Layer w1.524: D11.1 23.523,105.458 25.476,103.505 Q2.2
NetD12_1: D12.1 Q3.2 Valve3.1 | length 18.9
  Top Layer w1.905: Q3.2 40.513,107.239 Valve3.1
  Bottom Layer w1.524: D12.1 38.382,105.458 40.615,103.226 40.615,101.981 Q3.2
NetD13_1: D13.1 Q4.2 Valve4.1 | length 19
  Top Layer w1.905: Q4.2 55.804,107.975 Valve4.1
  Bottom Layer w1.524: D13.1 53.977,105.458 55.88,103.556 55.88,101.956 Q4.2
NetMotor1_1: Motor1.0 U4.4 U4.8 | length 45.7
  Top Layer w1.016: U4.4 U4.8
  Top Layer w2.54: Motor1.0 59.868,86.712 59.868,82.652 ; U4.8 U4.8@55.905,78.689 ; U4.8 U4.8@55.905,78.689 ; U4.8 U4.8@55.905,78.689 ; U4.8@55.905,78.689 59.868,82.652 ; U4.8@55.905,78.689 59.868,82.652 ; U4.8@55.905,78.689 59.868,82.652
  other v3: 59.461,70.79 56.769,70.866 54.635,72.034 59.461,73.22 56.769,73.296 59.461,75.65 56.769,75.726 54.635,76.911 59.461,78.08 56.769,78.156
NetQ1_1: Q1.1 R9.2 R10.2 | length 9
  Top Layer w0.254: R10.2 R9.2 12.284,97.36 12.284,101.87 Q1.1
NetQ2_1: Q2.1 R13.2 R14.2 | length 8.3
  Top Layer w0.254: R14.2 R13.2 28.016,97.13 Q2.1
NetQ3_1: Q3.1 R17.2 R18.2 | length 8.1
  Top Layer w0.254: R18.2 42.965,96.571 R17.2 42.991,101.817 Q3.1
NetQ4_1: Q4.1 R22.2 R23.2 | length 9.4
  Top Layer w0.254: R23.2 57.517,96.319 R22.2 58.344,96.836 Q4.1
NetR2_2: R2.2 U3.1 | length 4.6
  Top Layer w0.254: R2.2 32.537,71.247 34.874,73.584 U3.1
NetR3_1: R3.1 U3.5 | length 7.8
  Top Layer w0.254: R3.1 31.623,82.079 34.809,78.892 35.56,78.892 36.144,79.477 U3.5
NetR3_2: R3.2 R4.2 U4.2 | length 31.9
  Top Layer w0.254: R4.2 30.81,78.41 30.505,78.715 R3.2 29.718,80.329 29.388,80.659 29.388,83.312 29.896,83.82 42.951,83.82 43.459,83.312 43.459,78.232 44.653,77.038 U4.2
NetR5_2: R5.2 U4.5 | length 7.8
  Top Layer w0.254: R5.2 42.963,71.45 v2(42.963,73.127) ; v2(44.323,74.371) 45.466,73.228 U4.5
  Bottom Layer w0.254: v2(42.963,73.127) 43.078,73.127 v2(44.323,74.371)
NetR6_2: R6.2 U4.6 | length 7.8
  Top Layer w0.254: R6.2 42.582,74.461 45.085,71.958 U4.6
NetR8_2: R8.2 U6.1 | length 7.9
  Top Layer w0.254: U6.1 12.107,85.827 13.524,85.827 R8.2
NetR9_1: R9.1 U6.5 | length 10.9
  Top Layer w0.254: U6.5 12.09,92.126 12.624,91.592 v2(12.624,90.907) ; R9.1 13.245,95.174 15.265,93.153 v2(15.265,92.862)
  Bottom Layer w0.254: v2(12.624,90.907) 14.503,90.907 15.265,91.669 v2(15.265,92.862)
NetR12_2: R12.2 U7.1 | length 9.2
  Top Layer w0.254: U7.1 24.553,86.182 26.619,86.182 27.305,86.868 27.305,89.687 28.358,90.74 R12.2
NetR13_1: R13.1 U7.5 | length 10.4
  Top Layer w0.254: v2(24.816,91.059) 24.816,92.812 U7.5 ; R13.1 29.312,96.467 v2(29.312,93.701)
  Bottom Layer w0.254: v2(24.816,91.059) 26.67,91.059 v2(29.312,93.701)
NetR16_2: R16.2 U8.1 | length 9.7
  Top Layer w0.254: U8.1 38.878,85.877 41.275,85.877 41.656,86.258 41.656,89.992 42.164,90.5 42.963,90.5 R16.2
NetR17_1: R17.1 U8.5 | length 11.8
  Top Layer w0.254: v2(39.141,90.551) U8.5 ; v2(44.55,93.626) 44.741,93.816 R17.1
  Bottom Layer w0.254: v2(39.141,90.551) 41.476,90.551 v2(44.55,93.626)
NetR21_2: R21.2 U10.1 | length 3.7
  Top Layer w0.254: R21.2 48.087,86.91 U10.1
NetR22_1: R22.1 U10.5 | length 21.6
  Top Layer w0.254: U10.5 50.673,92.38 50.673,86.512 51.308,85.877 52.603,85.877 53.137,86.411 53.137,89.487 59.422,95.772 R22.1
NetRP1_3: RP1.3 U1.1 U1.2 | length 50
  Top Layer w0.254: RP1.3 11.582,16.358 24.867,16.358 28.88,20.371 28.88,31.344 30.48,32.944 34.595,32.944 U1.1
  Top Layer w0.5: U1.2 U1.1
NetRP2_3: RP2.3 U1.6 U1.7 | length 33
  Top Layer w0.254: RP2.3 17.335,15.342 v1(24.841,15.342) v1@24.943,15.342 ; v1(33.452,22.301) 35.509,24.359 U1.7
  Top Layer w0.5: U1.7 U1.6
  Bottom Layer w0.254: v1(24.841,15.342) 31.801,22.301 v1(33.452,22.301)
NetRP3_3: RP3.3 U1.8 U1.9 | length 31.8
  Top Layer w0.254: RP3.3 23.038,14.275 v1@24.943,14.275 ; v1(33.452,20.904) 37.592,20.904 U1.8
  Top Layer w0.5: U1.8 U1.9
  Bottom Layer w0.254: v1(24.841,14.249) 24.867,14.249 31.521,20.904 v1(33.452,20.904)
NetU1_13: U1.13 U1.14 | length 1.3
  Top Layer w0.5: U1.13 U1.14
POWERA: C1.1 C3.1 C4.1 C5.1 C7.1 C8.1 C9.1 C12.1 D10.2 D11.2 D12.2 D13.2 P8.1 POWER1.0 U1.4 U3.6 U4.7 U5.1 U6.6 U7.6 U8.6 U10.6 Valve1.0 Valve2.0 Valve3.0 Valve4.0 | length 437.8
  Top Layer w0.254: C7.1 9.996,89.117 10.82,89.941 U6.6 ; C8.1 22.696,89.143 23.647,90.094 23.622,90.119 U7.6 ; D12.2 32.969,91.249 35.278,88.939 C9.1 36.26,88.939 37.871,90.551 U8.6 ; v2(33.757,81.001) v2@33.934,81.001 ; U3.6 v2@33.934,81.001 ; C4.1 35.168,81.497 34.671,81.001 v2@33.934,81.001 ; v2(39.116,75.641) 39.116,78.971 40.64,80.495 C3.1 ; D13.2 45.034,91.976 45.034,89.814 45.985,88.863 C12.1 47.944,88.863 49.124,90.043 49.098,90.068 U10.6
  Top Layer w0.508: D10.2 7.964,89.117 C7.1 ; D11.2 17.602,93.37 19.329,91.643 19.329,90.272 20.458,89.143 C8.1
  Top Layer w1.016: v5(44.78,68.758) 45.847,68.758 U4.7
  Top Layer w2.54: D10.2 2.083,101.37 7.29,106.577 Valve1.0 10.109,112.928 19.816,112.928 Valve2.0 25.578,112.696 25.578,112.725 35.056,112.725 Valve3.0 40.771,112.497 49.889,112.497 Valve4.0
  Bottom Layer w0.254: 5.588,75.286 5.588,86.766 5.588,93.472 6.784,94.668 D12.2@32.995,94.668 ; v2(33.757,81.001) 35.458,81.001 38.456,78.003 38.456,76.302 v2(39.116,75.641) 39.116,69.698 40.056,68.758 ; 39.116,68.783 39.141,68.758
  Bottom Layer w0.5: P8.1 27.328,8.461 29.947,5.842 33.071,5.842 36.601,9.373 36.601,27.266 C1.1 37.352,28.219 v1(35.56,28.219)
  Bottom Layer w1.016: POWER1.0 3.023,72.72 3.023,58.674 4.601,57.096 U5.1 1.957,53.519 1.047,52.609 1.047,43.581 v8(1.245,43.383) 1.118,43.256 1.118,14.503 3.886,11.735 21.514,11.735 24.714,8.534 P8.1
  Bottom Layer w1.524: D10.2 D11.2 D12.2@32.664,94.998 ; D12.2@32.995,94.668 D12.2@32.664,94.998 ; D13.2 D12.2 D12.2@32.664,94.998
  Bottom Layer w2.54: D10.2 2.083,90.272 5.588,86.766 5.588,75.286 POWER1.0 6.198,74.549 9.55,74.549 13.589,70.51 17.653,70.51 19.406,68.758 v5(44.78,68.758)
V5: P1.1 P1.2 P1.21 P1.23 P1.25 P1.27 P1.29 P1.31 | length 41.9
  Bottom Layer w0.5: P1.2 P1.1 18.898,18.136 20.396,19.634 20.396,42.012 P1.21 P1.23 P1.25 P1.27 P1.29 P1.31
VDD3.3: P4.28 P4.30 P4.32 P4.34 P4.36 P9.2 P10.2 P11.2 P12.1 R1.2 R7.2 R11.2 R15.2 R20.2 | length 129.8
  Top Layer w0.4: R7.2 14.402,80.19 ; v1(16.129,78.283) 14.402,80.01 14.402,80.19 ; R11.2 14.402,80.19 ; v1(18.948,78.638) 18.948,79.157 R15.2 R20.2 28.6,76.736 28.6,70.383 30.404,68.58 35.484,68.58 37.273,70.369 R1.2 40.27,68.402 42.139,68.402 43.002,67.539 43.002,60.808 50.851,52.959 P11.2@50.851,51.689
  Top Layer w0.5: P11.2@50.851,51.689 51.384,51.689 53.315,49.759 53.315,44.426 P10.2 51.332,42.013 53.442,39.903 53.442,34.928 P9.2 52.728,32.388 55.591,29.524 58.284,29.524 P4.28 P4.30 P4.32 P4.34 P4.36 59.538,8.585 57.074,6.121 53.442,6.121 P12.1
  Bottom Layer w0.4: v1(16.129,78.283) 18.593,78.283 v1(18.948,78.638)
pads on no net: P1.3 P1.4 P1.5 P1.6 P1.7 P1.8 P1.10 P1.17 P1.19 P1.20 P1.22 P1.33 P1.34 P1.35 P1.36 P3.12 P3.14 P3.16 P3.18 P3.20 P3.22 P3.24 P3.26 P4.1 P4.2 P4.3 P4.4 P4.5 P4.6 P4.7 P4.8 P4.9 P4.10 P4.11 P4.12 P4.13 P4.14 P4.15 P4.16 P4.17 P4.18 P4.19 P4.20 P4.21 P4.22 P4.23 P4.24 P4.25 P4.26 P4.27 P4.29 P4.31 P4.33 P4.35 P14.2 S1.3 S1.4

## Polygon pours and split planes (outlines as drawn)
GND on Bottom Layer "Bottom Layer-No Net" (solid, pour order 4): 0,0 61.824,0 61.824,115.164 61.849,115.189 0,115.189
GND on Top Layer "Top Layer-No Net" (solid, pour order 6): 0,0 61.849,0 61.849,115.189 0,115.189

## Keep-outs
Keep-Out Layer:
  lines w0.254: 0,0 0,115.189 61.849,115.189 61.849,0.025 61.824,0 0,0

## Silkscreen, mask and mechanical layers (free items; w line width, h text height)
Top Overlay:
  text "12V  GND" at 9.423,75.489 h0.76 r270
  text "A7" at 46.761,48.285 h1 r90
  text "A6" at 47.371,38.303 h1 r90
  text "A5  A6  A7  A8" at 27.534,31.293 h0.76 r90
  text "A5" at 47.117,29.286 h1 r90
  text "A1  A2  A3  A4" at 27.026,18.517 h0.76 r90
  text "A4  Gnd" at 52.959,11.379 h0.76
  text "IN1  IN2  IN3" at 36.424,11.176 h0.76
  text "Gnd" at 32.461,3.835 h0.76
  text "12V" at 22.758,3.785 h0.76

## Text inside footprints (layer, text, board x,y; h text height)
C5: Top Overlay "+" at 3.3,40.045 h0.8
C6: Top Overlay "+" at 10.053,21.385 h0.8 r180
L1: Top Overlay "+" at 3.676,27.065 h0.8
P2: Top Overlay "2" at 24.003,30.15 h0.8 r270; Top Overlay "1" at 21.463,29.642 h0.8 r270; Top Overlay "7" at 21.463,18.466 h0.8 r270; Top Overlay "8" at 24.003,18.466 h0.8 r270
P3: Top Overlay "2" at 13.31,65.862 h0.8; Top Overlay "1" at 13.818,63.322 h0.8
P6: Top Overlay "2" at 12.192,75.387 h0.8; Top Overlay "1" at 12.7,72.847 h0.8; Top Overlay "7" at 23.876,72.847 h0.8; Top Overlay "8" at 23.876,75.387 h0.8
P14: Top Overlay "8" at 24.003,31.344 h0.8 r270; Top Overlay "7" at 21.463,31.344 h0.8 r270; Top Overlay "1" at 21.463,42.52 h0.8 r270; Top Overlay "2" at 24.003,43.028 h0.8 r270